# Allegro board gumstix_expansion_v1_4.brd
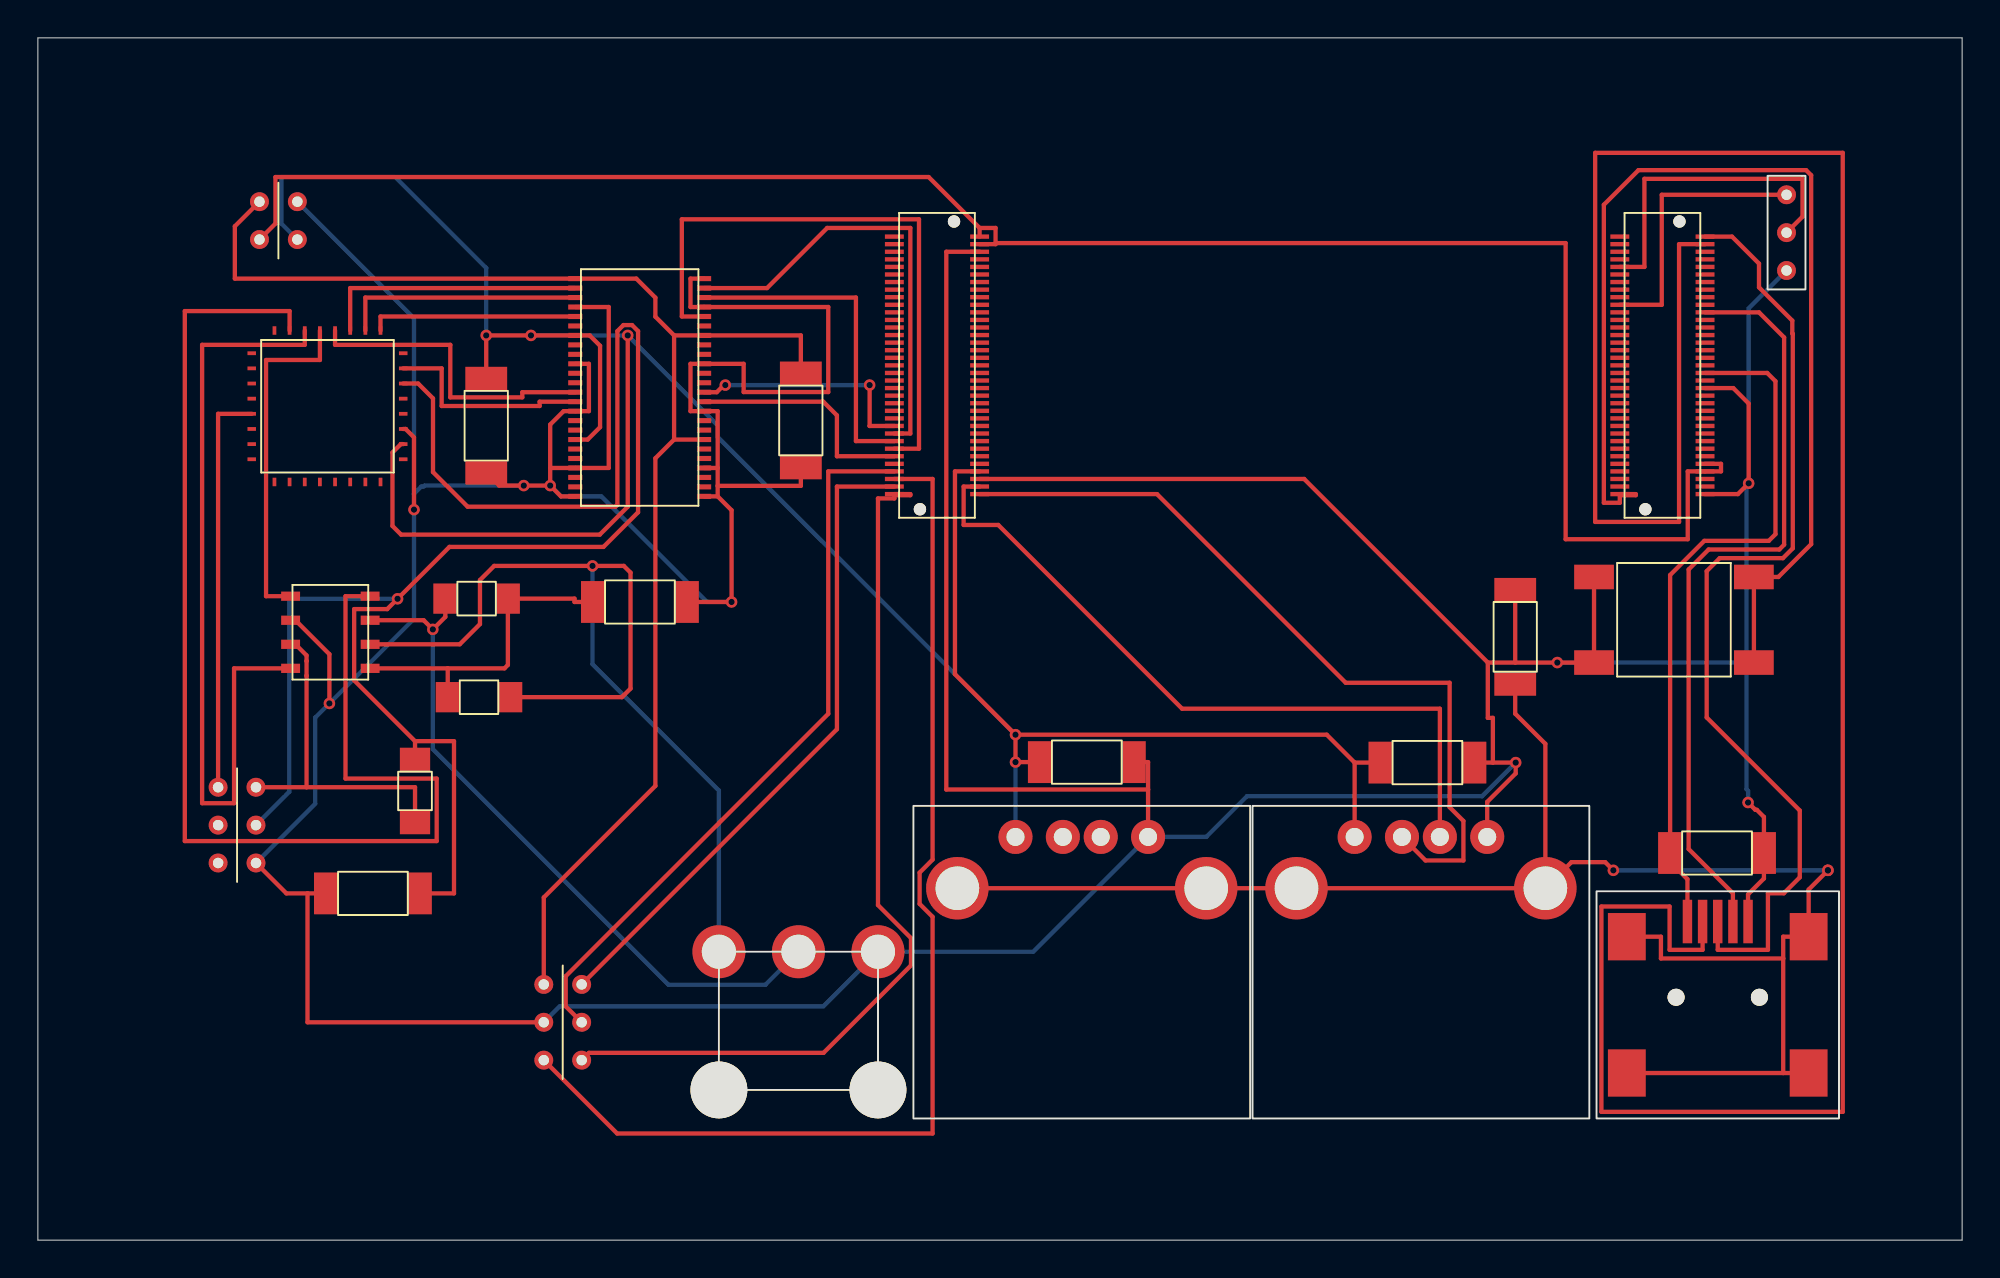
[diagram p0: board, top side]
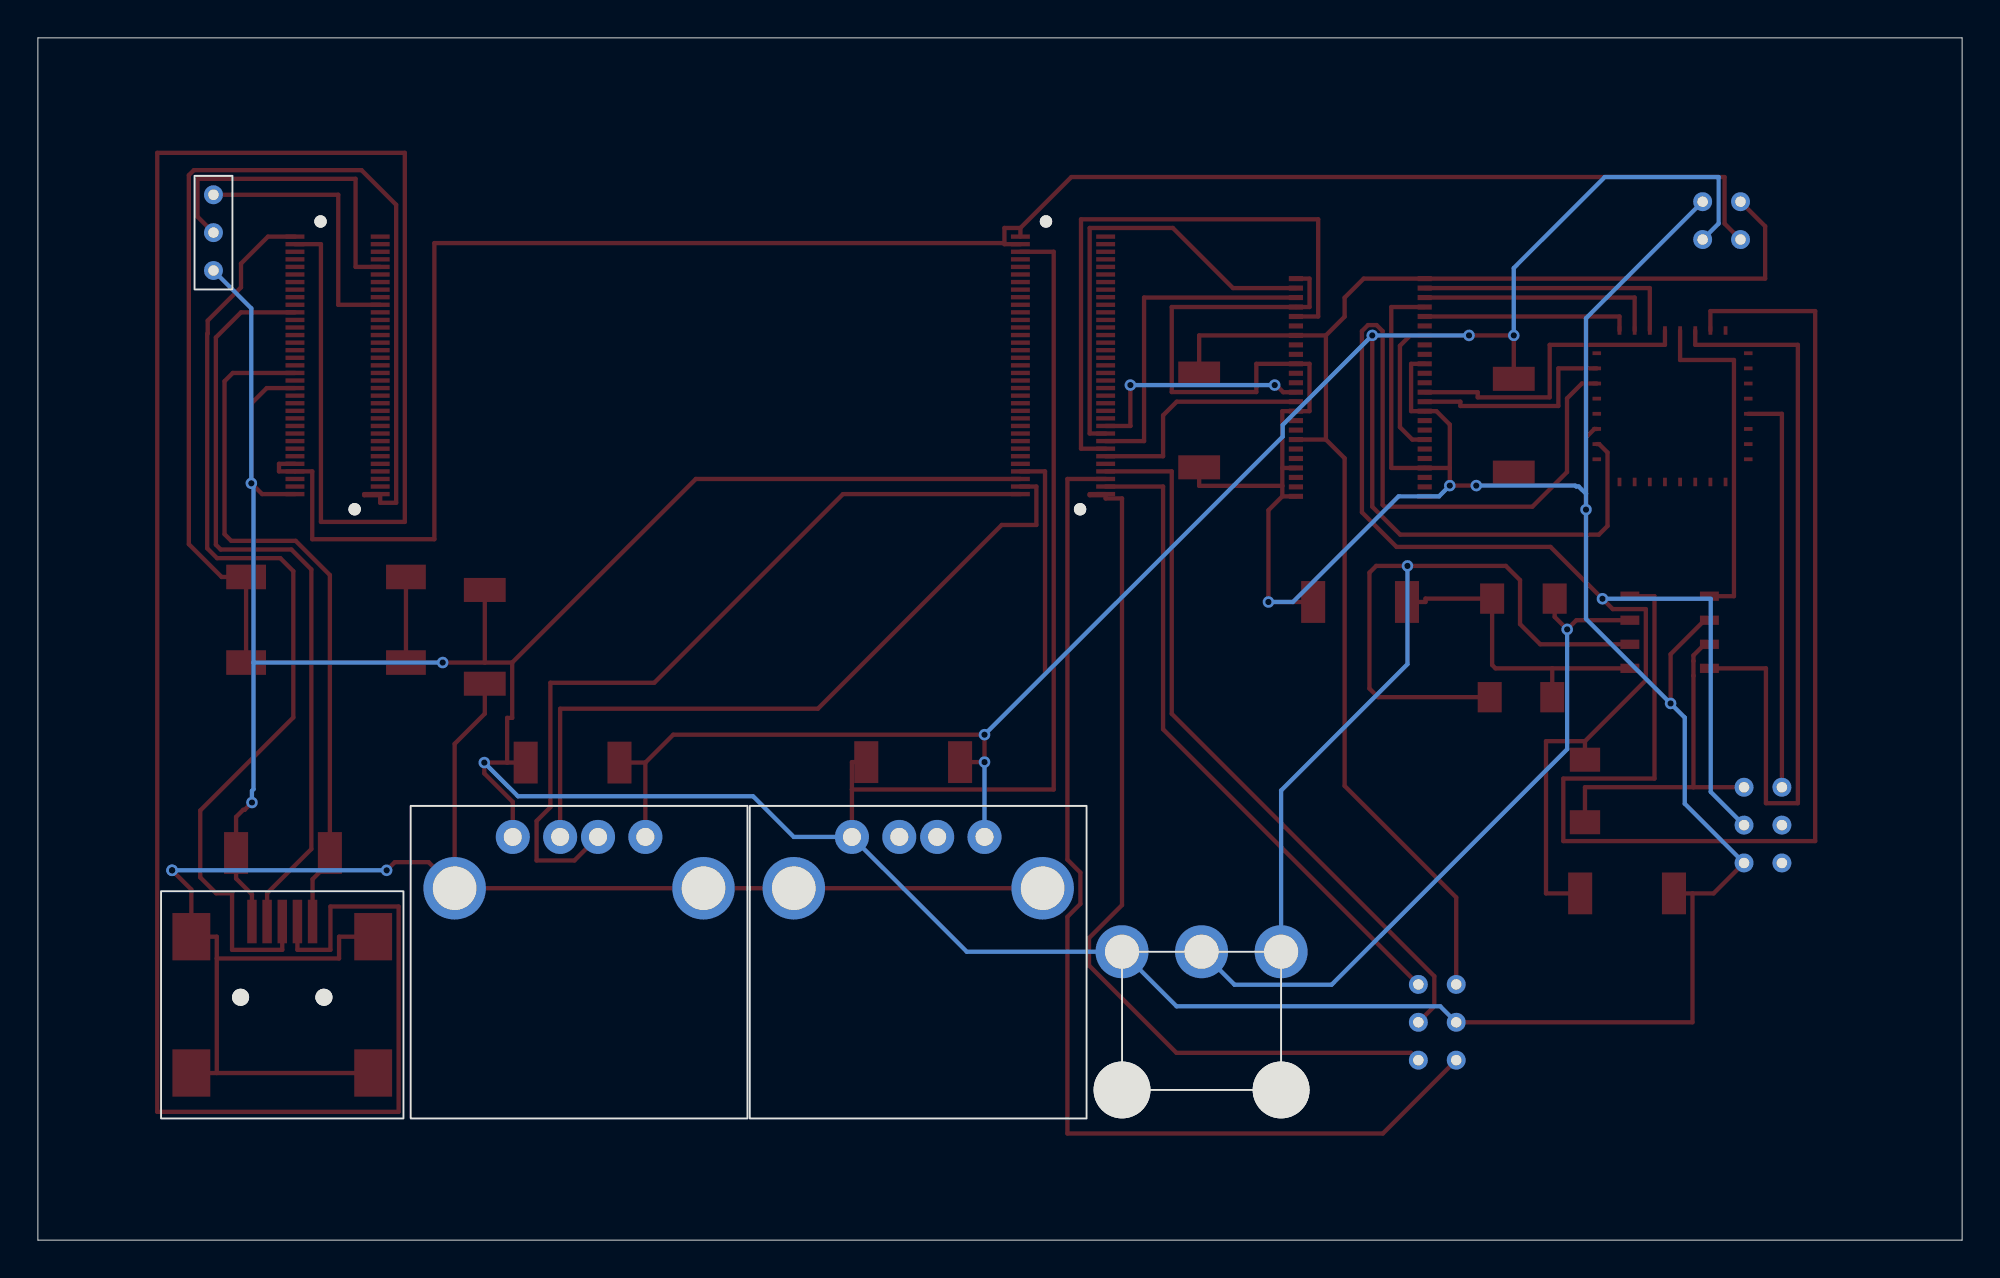
[diagram p1: board, bottom side, seen from below]

Outline 101.6 x 63.5 mm; copper layers: TOP, BOTTOM. Coordinates in mm from the lower left corner of the outline.
Outline path: 0,63.5 101.6,63.5 101.6,0 0,0 0,63.5

## Placement (name value [footprint] x y rotation side)
C1  4.7u  [SMDCAP]  73.3 25.22 180 top
C3  4.7u  [SMDCAP]  55.32 25.25 180 top
C5  4.7u  [SMDCAP]  88.6 20.45 180 top
C9  0.1u  [SMDCAP]  23.67 42.95 270 top
C10  0.1u  [SMDCAP]  40.28 43.23 270 top
C11  0.1u  [SMDCAP]  31.72 33.71 180 top
C12  0.1u  [SMDCAP]  17.75 18.31 0 top
C13  1n  [SMDCAP]  78 31.93 90 top
J1  GUMSTIX_J1  [GUMSTIX]  85.78 46.2 180 top
J2  GUMSTIX_J4  [GUMSTIX]  47.47 46.2 0 top
J3  4 HEADER  [DIP4_CONN]  12.7 53.85 0 top
J4  CON6  [USBA]  73.03 14.05 0 top
J6  CON6  [USBA]  55.12 14.05 0 top
J7  Background Header  [DIP6_CONN]  10.52 21.92 0 top
J9  CON3  [DIP3]  92.33 53.21 0 top
J10  CON6  [DIP6_CONN]  27.71 11.51 0 top
J11  CON3  [MOLEX_3]  40.16 11.58 0 top
J12  CON9  [MUSBA_TSMT]  88.7 12.83 90 top
R3  60  [SMDRES]  23.16 33.88 180 top
R4  60  [SMDRES]  23.29 28.68 180 top
R5  10k  [SMDRES]  19.91 23.72 270 top
S1  -  [SWITCH]  86.39 32.77 0 top
U1  MC9S08DZ60  [MC9S08_LQFP32]  15.29 44.04 180 top
U2  SN74LVC16T245  [SN74_DGG]  31.78 45.03 0 top
U3  TJA1040T  [TJA1040_SO8]  15.44 32.11 0 top

## Library data of the parts
C1 C3 C5 C9 C10 = C_elect_0
C11 C12 = C
C13 = C_elect_1
J1 = GUMSTIX_J1
J2 = GUMSTIX_J4
J3 = 4 HEADER
J4 J6 J10 = CON6
J7 = CONN MOD 6-6_J
J9 J11 = CON3
J12 = CON9
R3-R5 = R
S1 = SWITCH
U1 = MC9S08DZ60
U2 = SN74LVC16T245
U3 = TJA1040T

## Footprints (pads in the part's own frame, mm; a bottom-side part is the same pattern mirrored in y, then rotated)
DIP3
  round 1 hole 0.55: 1(0,2) 2(0,0) 3(0,-2)
DIP4_CONN
  round 1 hole 0.55: 1(-1,1) 2(-1,-1) 3(1,-1) 4(1,1)
DIP6_CONN
  round 1 hole 0.55: 1(-1,2) 2(-1,0) 3(-1,-2) 4(1,-2) 5(1,0) 6(1,2)
GUMSTIX
  round 0.65 hole 0.65 unplated: (-0.9,-7.6) (0.9,7.6)
  rect 1x0.23 smd: 1(2.25,6.8) 2(2.25,6.4) 3(2.25,6) 4(2.25,5.6) 5(2.25,5.2) 6(2.25,4.8) 7(2.25,4.4) 8(2.25,4) 9(2.25,3.6) 10(2.25,3.2) 11(2.25,2.8) 12(2.25,2.4) 13(2.25,2) 14(2.25,1.6) 15(2.25,1.2) 16(2.25,0.8) 17(2.25,0.4) 18(2.25,0) 19(2.25,-0.4) 20(2.25,-0.8) 21(2.25,-1.2) 22(2.25,-1.6) 23(2.25,-2) 24(2.25,-2.4) 25(2.25,-2.8) 26(2.25,-3.2) 27(2.25,-3.6) 28(2.25,-4) 29(2.25,-4.4) 30(2.25,-4.8) 31(2.25,-5.2) 32(2.25,-5.6) 33(2.25,-6) 34(2.25,-6.4) 35(2.25,-6.8) 36(-2.25,-6.8) 37(-2.25,-6.4) 38(-2.25,-6) 39(-2.25,-5.6) 40(-2.25,-5.2) 41(-2.25,-4.8) 42(-2.25,-4.4) 43(-2.25,-4) 44(-2.25,-3.6) 45(-2.25,-3.2) 46(-2.25,-2.8) 47(-2.25,-2.4) 48(-2.25,-2) 49(-2.25,-1.6) 50(-2.25,-1.2) 51(-2.25,-0.8) 52(-2.25,-0.4) 53(-2.25,0) 54(-2.25,0.4) 55(-2.25,0.8) 56(-2.25,1.2) 57(-2.25,1.6) 58(-2.25,2) 59(-2.25,2.4) 60(-2.25,2.8) 61(-2.25,3.2) 62(-2.25,3.6) 63(-2.25,4) 64(-2.25,4.4) 65(-2.25,4.8) 66(-2.25,5.2) 67(-2.25,5.6) 68(-2.25,6) 69(-2.25,6.4) 70(-2.25,6.8)
MC9S08_LQFP32
  rect 0.45x0.2 smd: 1(-4,2.8) 2(-4,2) 3(-4,1.2) 4(-4,0.4) 5(-4,-0.4) 6(-4,-1.2) 7(-4,-2) 8(-4,-2.8) 17(4,-2.8) 18(4,-2) 19(4,-1.2) 20(4,-0.4) 21(4,0.4) 22(4,1.2) 23(4,2) 24(4,2.8)
  rect 0.2x0.45 smd: 9(-2.8,-4) 10(-2,-4) 11(-1.2,-4) 12(-0.4,-4) 13(0.4,-4) 14(1.2,-4) 15(2,-4) 16(2.8,-4) 25(2.8,4) 26(2,4) 27(1.2,4) 28(0.4,4) 29(-0.4,4) 30(-1.2,4) 31(-2,4) 32(-2.8,4)
MOLEX_3
  round 3 hole 3 unplated: (-4.2,-3.65) (4.2,-3.65)
  round 2.8 hole 1.8: 1(-4.2,3.65) 2(0,3.65) 3(4.2,3.65)
MUSBA_TSMT
  round 0.9 hole 0.9 unplated: (0,2.2) (0,-2.2)
  rect 2.3x0.5 smd: 1(4,1.6) 2(4,0.8) 3(4,0) 4(4,-0.8) 5(4,-1.6)
  rect 2.5x2 smd: 6(-4,4.8) 7(-4,-4.8) 8(3.2,-4.8) 9(3.2,4.8)
SMDCAP
  rect 1.27x2.21 smd: 1(-2.54,0) 2(2.413,0)
SMDRES
  rect 1.27x1.6 smd: 1(-1.651,0) 2(1.651,0)
SN74_DGG
  rect 0.75x0.27 smd: 1(-3.4,5.75) 2(-3.4,5.25) 3(-3.4,4.75) 4(-3.4,4.25) 5(-3.4,3.75) 6(-3.4,3.25) 7(-3.4,2.75) 8(-3.4,2.25) 9(-3.4,1.75) 10(-3.4,1.25) 11(-3.4,0.75) 12(-3.4,0.25) 13(-3.4,-0.25) 14(-3.4,-0.75) 15(-3.4,-1.25) 16(-3.4,-1.75) 17(-3.4,-2.25) 18(-3.4,-2.75) 19(-3.4,-3.25) 20(-3.4,-3.75) 21(-3.4,-4.25) 22(-3.4,-4.75) 23(-3.4,-5.25) 24(-3.4,-5.75) 25(3.4,-5.75) 26(3.4,-5.25) 27(3.4,-4.75) 28(3.4,-4.25) 29(3.4,-3.75) 30(3.4,-3.25) 31(3.4,-2.75) 32(3.4,-2.25) 33(3.4,-1.75) 34(3.4,-1.25) 35(3.4,-0.75) 36(3.4,-0.25) 37(3.4,0.25) 38(3.4,0.75) 39(3.4,1.25) 40(3.4,1.75) 41(3.4,2.25) 42(3.4,2.75) 43(3.4,3.25) 44(3.4,3.75) 45(3.4,4.25) 46(3.4,4.75) 47(3.4,5.25) 48(3.4,5.75)
SWITCH
  rect 2.1x1.3 smd: 1(-4.22,2.26) 2(-4.22,-2.26) 3(4.22,-2.26) 4(4.22,2.26)
TJA1040_SO8
  rect 1x0.49 smd: 1(-2.1,1.905) 2(-2.1,0.635) 3(-2.1,-0.635) 4(-2.1,-1.905) 5(2.1,-1.905) 6(2.1,-0.635) 7(2.1,0.635) 8(2.1,1.905)
USBA
  round 3.3 hole 2.3 unplated: (-6.57,4.54) (6.57,4.54)
  round 1.8 hole 0.95: 1(-3.5,7.25) 2(-1,7.25) 3(1,7.25) 4(3.5,7.25)

## Nets
GND: C1.1(+) C3.1(+) C5.1(+) C9.2(-) C10.2(-) C11.1 C12.1 C13.2(-) J1.56(GND#56) J1.70(GND#70) J2.3(GND#3) J2.33(GND#33) J3.4 J4.4 J6.4 J7.4(2) J9.3 J10.2 J11.3 J12.5 S1.1 S1.2 U1.3(VSS) U2.4(GND#4) U2.10(GND#10) U2.15(GND#15) U2.21(GND#21) U2.24(2DIR) U2.25(2OEN) U2.28(GND#28) U2.34(GND#34) U2.39(GND#39) U2.45(GND#45) U2.48(1OEN) U3.2(GND)
VCC_1.8: C10.1(+) J3.1 J10.1 U2.1(1DIR) U2.31(VCCA#31) U2.42(VCCA#42)
VCC_3.3: J1.66(VSYSTEM#66) J1.67(VSYSTEM#67) J2.1(VSYSTEM#1) J2.2(VSYSTEM#2) J3.2
VDD_S08: J7.6 R5.2 U3.3(VCC)
BKGD: J7.1 U1.21(BKGD/MS)
CANH: J11.2 R3.2 U3.7(CANH)
CANL: J11.1 R4.1 U3.6(CANL)
COMMON_SHIELD: C13.1(+) J12.6 J12.7 J12.8 J12.9
GPIO18: J2.38(GPIO23_MMC3_DAT5) J10.3
GPIO19: J2.36(GPIO19_MMC3_D1) J10.4
GPIO20: J2.39(GPIO20_MMC3_D2) J10.5
GPIO21: J2.37(GPIO22_MMC3_DAT6) J10.6
GPIO165_IR_RXD3: J1.31(GPIO165_IR_RXD3) J9.2
GPIO166_IR_TXD3: J1.26(GPIO166_IR_TXD3) J9.1
RESET: C12.2 J7.5(4) R5.1 U1.6(RESETN)
RXCAN: U1.14(PTE7/RXD2/RXCAN) U3.4(RXD)
SPI_CLOCK_1.8V: J2.43(GPIO171_SPI1_CLK) U2.46(1A2)
SPI_CLOCK_5V: U1.10(PTE3/SPSCK) U2.3(1B2)
SPI_CS_1.8V: J2.42(GPIO175_SPI1_CS1) U2.44(1A3)
SPI_CS_5V: U1.9(PTE2/SSN) U2.5(1B3)
SPI_INTERRUPT_1.8V: J2.41(GPIO114_SPI1_NIRQ) U2.35(2A2)
SPI_INTERRUPT_5V: U1.7(PTE0/TXD1) U2.14(2B2)
SPI_MISO_1.8V: J2.45(GPIO173_SPI1_MISO) U2.36(2A1)
SPI_MISO_5V: U1.12(PTE5/SDA/MISO) U2.13(2B1)
SPI_MOSI_1.8V: J2.44(GPIO172_SPI1_MOSI) U2.47(1A1)
SPI_MOSI_5V: U1.11(PTE4/SCL/MOSI) U2.2(1B1)
STB: U1.15(PTD0/PID0/TPM2CH0) U3.8(STB)
TXCAN: U1.13(PTE6/TXD2/TXCAN) U3.1(TXD)
USB_OTG_DM: J1.37(USBOTG_DM) J12.2
USB_OTG_DP: J1.36(USBOTG_DP) J12.3
USB_OTG_ID: J1.46(USBOTG_ID) J12.4
USB_OTG_VBUS: C5.2(-) J1.54(USBOTG_VBUS) J12.1
USBH_DM: J2.35(USBH_DM) J4.2
USBH_DP: J2.34(USBH_DP) J4.3
USBH_VBUS: C1.2(-) C3.2(-) C9.1(+) J2.32(USBH_VBUS) J3.3 J4.1 J6.1 U1.2(VDD) U2.7(VCCB#7) U2.18(VCCB#18)
N03550: J1.1(NRESPWRON) S1.3 S1.4
N10323: C11.2 R3.1 R4.2 U3.5(SPLIT)

Pads without a net: J1 2 3 4 5 6 7 8 9 10 11 12 13 14 15 16 17 18 19 20 21 22 23 24 25 27 28 29 30 32 33 34 35 38 39 40 41 42 43 44 45 47 48 49 50 51 52 53 55 57 58 59 60 61 62 63 64 65 68 69; J2 4 5 6 7 8 9 10 11 12 13 14 15 16 17 18 19 20 21 22 23 24 25 26 27 28 29 30 31 40 46 47 48 49 50 51 52 53 54 55 56 57 58 59 60 61 62 63 64 65 66 67 68 69 70; J6 2 3; J7 2 3; U1 1 4 5 8 16 17 18 19 20 22 23 24 25 26 27 28 29 30 31 32; U2 6 8 9 11 12 16 17 19 20 22 23 26 27 29 30 32 33 37 38 40 41 43

## Via types
v1: diameter 0.61, hole 0.33, TOP to BOTTOM, 22 vias

## Routing (per net, layer and track width the routed paths; a pad name or vN(x,y) marks a point on that pad's centre or on a via; arc(x,y) is an arc through that point)
GND: length 381.3
  TOP w0.229: 27.05,40.78 U2.21 30.14,40.78 30.14,49.28 U2.4 ; 27.05,40.78 27.05,43.08 27.76,43.78 U2.15 29.09,43.78 29.09,46.28 U2.10 ; 27.05,40.78 v1(27.05,39.85) ; U3.2 13.6,32.74 15.39,30.95 v1(15.39,28.35) ; 35.89,40.78 35.89,39.84 ; 35.89,40.78 U2.28 ; 35.89,40.78 35.89,43.78 U2.34 34.46,43.78 34.46,46.28 U2.39 37.27,46.28 37.27,44.79 41.73,44.79 41.73,49.28 U2.45 34.46,49.28 34.46,50.78 U2.48 ; 35.89,39.84 35.89,39.28 ; 35.89,39.84 40.28,39.84 C10.2 ; C3.1 58.62,25.25 58.62,23.8 ; v1(27.05,39.85) 27.62,39.28 U2.24 ; v1(27.05,39.85) v1(25.65,39.85) 24.36,39.85 C9.2 ; J4.4 76.53,23.15 78.03,24.65 v1(78.03,25.22) 76.82,25.22 ; v1(90.3,23.11) 90.68,22.73 90.76,22.73 91.14,22.35 C5.1 91.14,19.1 90.3,18.26 J12.5 ; U1.3 19.42,42.84 19.86,42.4 v1(19.86,38.58) ; 35.89,39.28 36.63,38.55 v1(36.63,33.71) C11.1 ; 35.89,39.28 U2.25 ; 78,30.51 C13.2 ; 78,30.51 76.56,30.51 ; 78,30.51 v1(80.23,30.51) S1.2 S1.1 ; 76.82,25.22 C1.1 ; 76.82,25.22 76.82,27.58 76.56,27.58 76.56,30.51 ; J2.33 66.86,40.2 76.56,30.51 ; C12.1 14.24,18.31 ; 14.24,18.31 13.12,18.31 J7.4 ; 14.24,18.31 14.24,11.51 J10.2 ; 58.62,23.8 47.97,23.8 47.97,52.2 J2.3 ; 58.62,23.8 J6.4 ; J1.56 89.52,45 90.33,44.19 v1(90.33,39.97) 89.76,39.4 J1.70
  BOTTOM w0.229: v1(78.03,25.22) 76.25,23.44 63.84,23.44 61.69,21.3 J6.4 52.55,15.23 J11.3 41.47,12.35 27.55,12.35 J10.2 ; 19.86,39.42 v1(19.86,38.58) 19.86,32.81 v1(15.39,28.35) 14.64,27.6 14.64,23.05 J7.4 ; 19.86,39.42 19.86,48.69 J3.4 ; 19.86,39.42 20.25,39.81 20.38,39.81 20.43,39.85 v1(25.65,39.85) ; v1(36.63,33.71) 35.33,33.71 29.75,39.28 27.62,39.28 v1(27.05,39.85) ; 90.21,30.51 v1(80.23,30.51) ; 90.21,30.51 90.21,23.82 90.3,23.74 v1(90.3,23.11) ; 90.21,30.51 90.21,39.86 v1(90.33,39.97) 90.33,49.21 J9.3
VCC_1.8: length 77
  TOP w0.229: 33.59,47.78 33.59,42.28 ; 33.59,47.78 U2.42 40.28,47.78 C10.1 ; 33.59,47.78 32.6,48.77 32.6,49.78 31.6,50.78 U2.1 10.4,50.78 10.4,53.55 J3.1 ; 33.59,42.28 32.6,41.3 32.6,23.99 26.71,18.1 J10.1 ; 33.59,42.28 U2.31
VCC_3.3: length 103.7
  TOP w0.229: 49.72,53.46 47.03,56.15 12.54,56.15 12.54,53.69 J3.2 ; 49.72,53.46 50.57,53.46 50.57,52.66 ; 49.72,53.46 J2.1 ; 50.57,52.66 50.57,52.6 J2.2 ; 50.57,52.66 80.66,52.66 80.66,37.02 87.11,37.02 87.11,40.6 J1.67 88.87,40.6 88.87,41 J1.66
VDD_S08: length 18.3
  TOP w0.229: R5.2 19.91,23.92 14.19,23.92 ; 14.19,23.92 14.19,29.81 14.19,30.88 13.6,31.47 U3.3 ; 14.19,23.92 J7.6
BKGD: length 21.5
  TOP w0.229: J7.1 9.52,43.64 U1.21
CANH: length 36.9
  TOP w0.229: U3.7 20.37,32.74 v1(20.85,32.26) 21.51,32.92 R3.2
  BOTTOM w0.229: v1(20.85,32.26) 20.85,25.93 33.29,13.49 38.41,13.49 J11.2
CANL: length 52.8
  TOP w0.229: U3.6 22.28,31.47 23.34,32.54 23.34,34.86 24.09,35.61 v1(29.29,35.61) 30.94,35.61 31.29,35.26 31.29,29.13 30.84,28.68 R4.1
  BOTTOM w0.229: J11.1 35.96,23.75 29.29,30.42 v1(29.29,35.61)
COMMON_SHIELD: length 89.7
  TOP w0.229: 79.59,18.59 48.55,18.59 ; 79.59,18.59 79.59,26.21 78,27.8 C13.1 ; 79.59,18.59 80.97,19.96 82.75,19.96 v1(83.19,19.53) ; J12.7 92.15,8.83 ; 92.15,8.83 J12.6 ; 92.15,8.83 92.15,14.88 ; 92.15,14.88 92.15,16.03 J12.8 93.5,18.52 v1(94.51,19.53) ; 92.15,14.88 85.7,14.88 85.7,16.03 J12.9
  BOTTOM w0.229: v1(94.51,19.53) v1(83.19,19.53)
GPIO18: length 59.3
  TOP w0.229: J10.3 30.59,5.63 47.24,5.63 47.24,17.08 46.56,17.76 46.56,19.41 47.24,20.1 47.24,40.2 J2.38
GPIO19: length 47.6
  TOP w0.229: J10.4 29.1,9.89 41.48,9.89 46.1,14.51 46.1,15.95 44.36,17.7 44.36,39.17 45.22,39.17 45.22,39.34 46.07,39.34 46.07,39.4 J2.36
GPIO20: length 38.7
  TOP w0.229: J2.39 41.73,40.6 41.73,27.8 27.87,13.94 27.87,12.35 J10.5
GPIO21: length 34.9
  TOP w0.229: J2.37 42.19,39.8 42.19,26.98 J10.6
GPIO165_IR_RXD3: length 17.5
  TOP w0.229: J1.31 84.83,51.4 84.83,56.06 93.17,56.06 93.17,54.06 J9.2
GPIO166_IR_TXD3: length 14.6
  TOP w0.229: J9.1 85.74,55.21 85.74,49.4 J1.26
RESET: length 93.1
  TOP w0.229: 19.91,26.35 21.97,26.35 21.97,18.31 C12.2 ; 19.91,26.35 R5.1 ; 19.91,26.35 16.7,29.57 16.7,33.33 18.44,33.33 v1(18.99,33.87) 21.73,36.61 29.86,36.61 31.69,38.44 31.69,48.01 31.37,48.33 30.92,48.33 30.6,48.01 30.6,38.84 30.5,38.74 22.69,38.74 20.86,40.57 20.86,44.46 20.08,45.24 U1.6
  BOTTOM w0.229: v1(18.99,33.87) 13.27,33.87 13.27,23.68 J7.5
RXCAN: length 42.2
  TOP w0.229: U1.14 14.09,47.29 8.67,47.29 8.67,23.08 10.36,23.08 10.36,30.2 U3.4
SPI_CLOCK_1.8V: length 17.6
  TOP w0.229: J2.43 43.19,42.2 43.19,49.78 U2.46
SPI_CLOCK_5V: length 12.8
  TOP w0.229: U1.10 17.29,49.78 U2.3
SPI_CS_1.8V: length 32.2
  TOP w0.229: J2.42 46.52,41.8 46.52,53.92 34,53.92 34,48.78 U2.44
SPI_CS_5V: length 11
  TOP w0.229: U1.9 18.09,48.78 U2.5
SPI_INTERRUPT_1.8V: length 12.5
  TOP w0.229: J2.41 42.19,41.4 42.19,43.56 41.47,44.28 U2.35
SPI_INTERRUPT_5V: length 11.3
  TOP w0.229: U2.14 26.49,44.28 26.49,44.06 21.32,44.06 21.32,46.04 U1.7
SPI_MISO_1.8V: length 12.4
  TOP w0.229: U2.36 35.84,44.78 36.22,45.16 v1(36.3,45.16) ; v1(43.92,45.16) 43.92,43 43.92,43 J2.45
  BOTTOM w0.229: v1(36.3,45.16) v1(43.92,45.16)
SPI_MISO_5V: length 16.5
  TOP w0.229: U2.13 25.58,44.78 25.58,44.51 21.78,44.51 21.78,47.29 15.69,47.29 U1.12
SPI_MOSI_1.8V: length 23.9
  TOP w0.229: U2.47 38.5,50.28 41.67,53.46 46.07,53.46 46.07,42.6 J2.44
SPI_MOSI_5V: length 14.1
  TOP w0.229: U1.11 16.49,50.28 U2.2
STB: length 66.9
  TOP w0.229: U1.15 13.29,49.07 7.76,49.07 7.76,21.08 21.06,21.08 21.06,24.38 16.24,24.38 16.24,34.01 U3.8
TXCAN: length 18.2
  TOP w0.229: U1.13 14.89,46.49 12.05,46.49 12.05,34.01 U3.1
USB_OTG_DM: length 136.4
  TOP w0.229: J1.37 86.65,52.6 86.65,37.93 82.23,37.93 82.23,57.43 95.3,57.43 95.3,6.78 82.55,6.78 82.55,17.62 86.15,17.62 86.15,15.33 87.9,15.33 J12.2
USB_OTG_DP: length 51.6
  TOP w0.229: J1.36 89.45,53 90.88,51.58 90.88,50.32 92.63,48.56 92.63,47.89 92.66,47.87 92.66,36.54 92.14,36.02 88.8,36.02 88.11,35.33 88.11,27.61 93.03,22.69 93.03,19.16 92.19,18.32 91.35,18.32 91.35,15.33 88.7,15.33 J12.3
USB_OTG_ID: length 40.8
  TOP w0.229: J1.46 90.88,49 92.2,47.68 92.2,36.73 91.95,36.48 88.21,36.48 87.16,35.42 87.16,20.66 89.5,18.32 J12.4
USB_OTG_VBUS: length 37.1
  TOP w0.229: J12.1 87.1,19.06 86.18,19.98 C5.2 86.18,35.13 87.99,36.93 91.39,36.93 91.74,37.29 91.74,45.36 91.31,45.8 J1.54
USBH_DM: length 42.4
  TOP w0.229: J2.35 59.09,39.4 69.05,29.44 74.54,29.44 74.54,22.87 75.27,22.14 75.27,20.05 73.27,20.05 J4.2
USBH_DP: length 38.8
  TOP w0.229: J4.3 74.02,28.07 60.42,28.07 50.71,37.77 48.88,37.77 48.88,39.8 J2.34
USBH_VBUS: length 143
  TOP w0.229: v1(51.62,26.7) 68.05,26.7 69.52,25.22 ; v1(51.62,26.7) v1(51.62,25.25) C3.2 ; v1(51.62,26.7) 48.42,29.89 48.42,40.6 J2.32 ; 69.52,25.22 C1.2 ; 69.52,25.22 J4.1 ; C9.1 v1(23.67,47.78) v1(26.03,47.78) U2.7 29.14,47.78 29.68,47.24 29.68,42.94 29.03,42.28 U2.18 ; v1(31.14,47.78) 31.14,38.74 29.67,37.26 19.18,37.26 18.72,37.72 18.72,41.6 19.17,42.04 U1.2
  BOTTOM w0.229: v1(51.62,26.7) 35.88,42.44 35.88,43.05 v1(31.14,47.78) v1(26.03,47.78) ; v1(23.67,47.78) 23.67,51.34 18.87,56.15 12.86,56.15 12.86,53.69 J3.3 ; J6.1 v1(51.62,25.25)
N03550: length 58.3
  TOP w0.229: J1.1 84.37,39.4 84.37,39.34 83.53,39.34 83.53,38.94 82.68,38.94 82.68,54.68 84.51,56.51 93.36,56.51 93.63,56.25 93.63,36.76 91.9,35.03 S1.4 S1.3
N10323: length 17
  TOP w0.229: 21.64,30.2 U3.5 ; 21.64,30.2 R4.2 ; 21.64,30.2 24.64,30.2 24.82,30.38 R3.1 28.33,33.88 28.33,33.71 C11.2
